# EAGLE board AFM_Power_board__ALL_SMD (EAGLE 9.6.2)
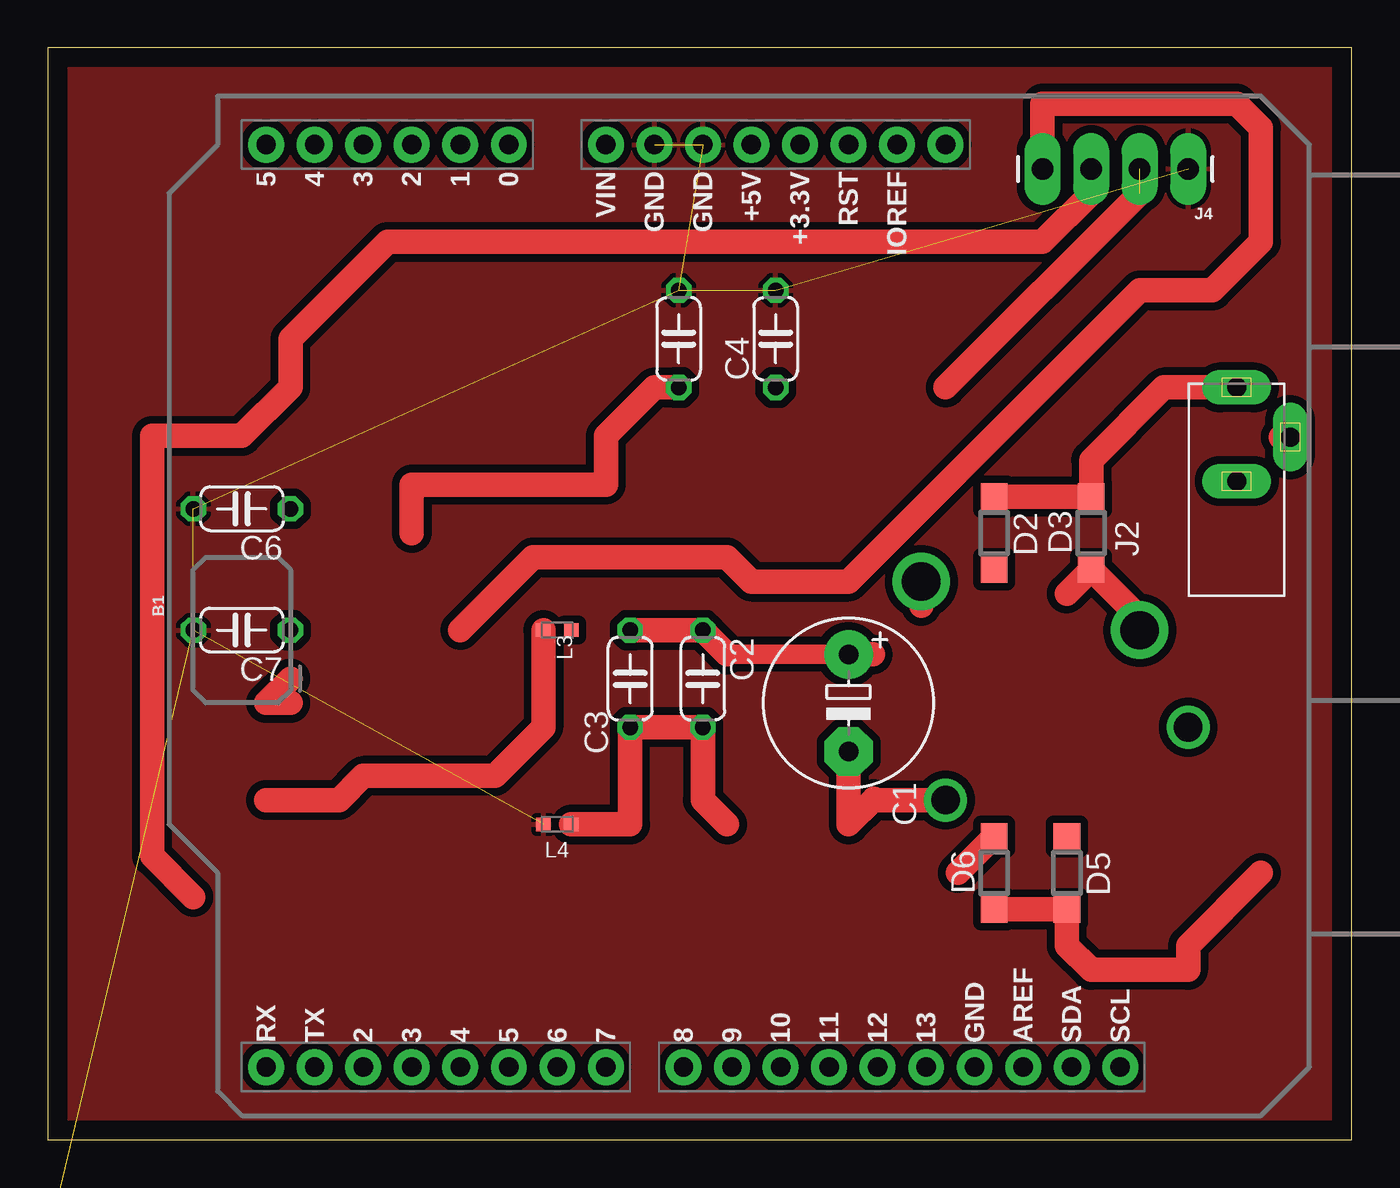
[diagram p0: board, top side]
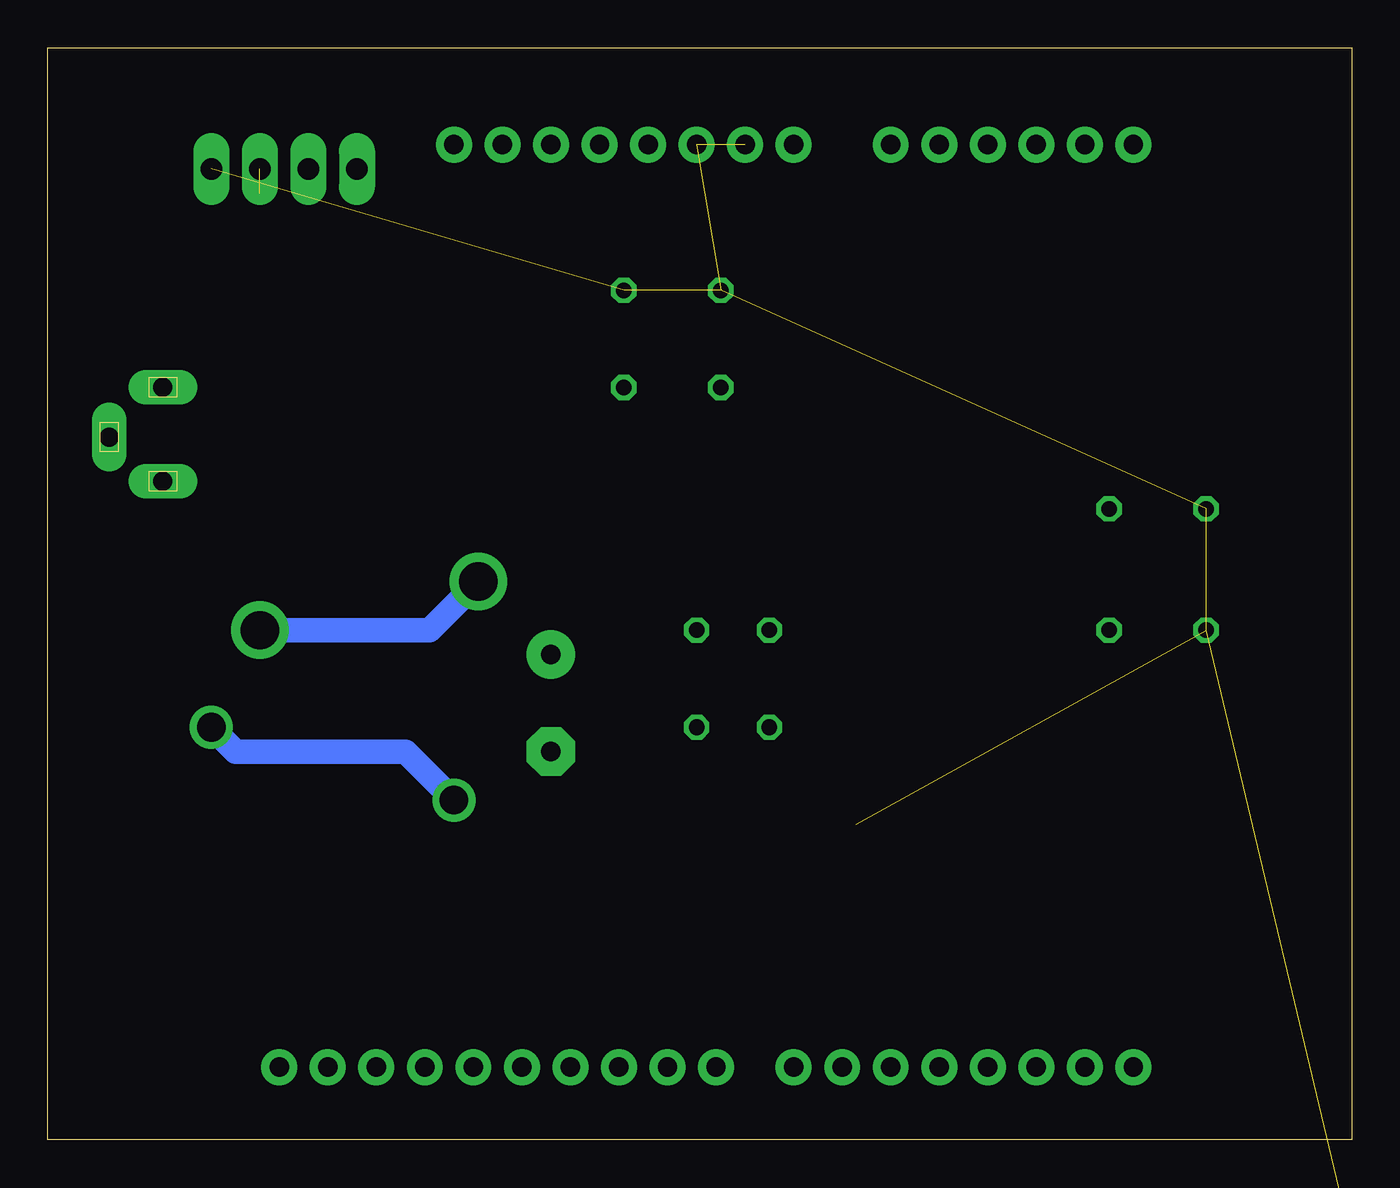
[diagram p1: board, bottom side, seen from below]

Size 68.25 x 57.14 mm. Coordinates in mm from the lower left corner, seen from the top.
Outline: 0,0 68.25,0 68.25,57.14 0,57.14 0,0
Copper layers (1*16): Top 0.035mm / dielectric 1.5mm / Bottom 0.035mm
Design rules "default": minimum track width 6mil, minimum drill 0.35mm, track to track 6mil, track to pad 6mil, pad to pad 6mil, via to via 6mil, smd to smd 6mil, copper to edge 40mil, drill to drill 6mil, minimum pad ring 10mil, minimum via ring 8mil, stop-mask expansion 4mil, vias tented up to drill 0mil, thermal gap 10mil

## Footprints (pad centres in the part's own frame; a part is rotated, then mirrored left to right if it is on the bottom)
UNO_R3_SHIELD = drill 1.016 pad 1.88: 3.3V 24.13,-2.54; 5V 24.13,0; A0 24.13,12.7; A1 24.13,15.24; A2 24.13,17.78; A3 24.13,20.32; A4 24.13,22.86; A5 24.13,25.4; AREF -24.13,-14.224; D2 -24.13,20.32; D3 -24.13,17.78; D4 -24.13,15.24; D5 -24.13,12.7; D6 -24.13,10.16; D7 -24.13,7.62; D8 -24.13,3.556; D9 -24.13,1.016; D10 -24.13,-1.524; D11 -24.13,-4.064; D12 -24.13,-6.604; D13 -24.13,-9.144; GND@0 24.13,2.54; GND@1 24.13,5.08; GND@2 -24.13,-11.684; IOREF 24.13,-7.62; NC 24.13,-10.16; RES 24.13,-5.08; RX -24.13,25.4; SCL -24.13,-19.304; SDA -24.13,-16.764; TX -24.13,22.86; VIN 24.13,7.62
E5-8,5 = drill 1.016 pad 2.54: + -2.54,0 | drill 1.016 pad 2.54 octagon: - 2.54,0
C050-024X044 = drill 0.813 octagon: 1 -2.54,0; 2 2.54,0
0805 = smd 0.8 x 1.2: 1 -0.9,0; 2 0.9,0
0603 = smd 1.1 x 1: 1 -0.85,0; 2 0.85,0
SOD123 = smd 1.4 x 1.4: A 1.9,0; C -1.9,0
694103303002 = drill 1 pad 1.8 long: 1 0,0; 2 -4.9,0; 3 -2.6,-2.8
1X04_LONGPADS = drill 1.118 pad 1.88 long: 1 0,0; 2 2.54,0; 3 5.08,0; 4 7.62,0
WE-CBF_0603_W2.2 = smd 0.75 x 0.7: 1 -0.725,0; 2 0.725,0
MSOP-16_MSE = smd 1.397 x 0.279: 1 -2.184,1.751; 2 -2.184,1.251; 3 -2.184,0.751; 4 -2.184,0.25; 5 -2.184,-0.25; 6 -2.184,-0.751; 7 -2.184,-1.251; 8 -2.184,-1.751; 9 2.184,-1.751; 10 2.184,-1.251; 11 2.184,-0.751; 12 2.184,-0.25; 13 2.184,0.25; 14 2.184,0.751; 15 2.184,1.251; 16 2.184,1.751 | smd 1.753 x 2.946: 17 0,0

## Placement (x,y rotation side)
B1  ARDUINO_UNO_R3_SHIELDBASIC  [UNO_R3_SHIELD]  36.83,27.94 90 top
C1  220uF  [E5-8,5]  41.91,22.86 270 top
C2  10uF  [C050-024X044]  34.29,24.13 270 top
C3  1uF  [C050-024X044]  30.48,24.13 270 top
C4  10uF  [C050-024X044]  38.1,41.91 90 top
C5  1uF  [C050-024X044]  33.02,41.91 90 top
C6  10uF  [C050-024X044]  10.16,33.02 180 top
C7  1uF  [C050-024X044]  10.16,26.67 180 top
C13  1.0uF  [0805]  6.35,-12.7 0 top  (outside the outline)
C14  10uF  [0805]  -5.08,-19.05 0 top  (outside the outline)
C15  10nF  [0603]  -5.08,-22.86 0 top  (outside the outline)
C16  10uF  [0805]  -1.27,-19.05 0 top  (outside the outline)
C17  10nF  [0603]  -1.27,-22.86 0 top  (outside the outline)
C18  10uF  [0805]  2.54,-19.05 0 top  (outside the outline)
C19  10uF  [0805]  6.35,-19.05 0 top  (outside the outline)
D2  1n4004  [SOD123]  49.53,31.75 270 top
D3  1n4004  [SOD123]  54.61,31.75 90 top
D5  1n4004  [SOD123]  53.34,13.97 270 top
D6  1n4004  [SOD123]  49.53,13.97 90 top
J2  694103303002  [694103303002]  62.23,39.37 90 top
J4  [1X04_LONGPADS]  59.69,50.8 180 top
L3  60Ohm@100 MHz  [WE-CBF_0603_W2.2]  26.67,26.67 180 top
L4  60Ohm@100 MHz  [WE-CBF_0603_W2.2]  26.67,16.51 180 top
R3  220  [0603]  2.54,-22.86 0 top  (outside the outline)
R4  100k  [0603]  6.35,-22.86 0 top  (outside the outline)
R5  100k  [0603]  -5.08,-26.67 0 top  (outside the outline)
R6  300k  [0603]  -1.27,-26.67 0 top  (outside the outline)
R7  300k  [0603]  2.54,-26.67 0 top  (outside the outline)
U2  LTC3260EMSE#PBF  [MSOP-16_MSE]  -2.54,-7.62 0 top  (outside the outline)

## Library data of the parts
B1 = SparkFun-Boards
C1 = BeagleBone_Blue_R3
C2-C7 = BeagleBone_Black_Wireless
C13 = SparkFun-Capacitors; PROD_ID: CAP-11625
C14 C16 C18 C19 = SparkFun-Capacitors; PROD_ID: CAP-14259
C15 C17 = SparkFun-Capacitors; PROD_ID: CAP-00867
D2 D3 D5 D6 = diode
J2 = DC Power Jacks; CREATED_BY: PCBLayout.com; DIGIKEY_PART_NUMBER: 732-5925-ND; MANUFACTURER: Wurth Electronics Inc.; MPN: 694103303002
J4 = SparkFun-Connectors; PROD_ID: CONN-09696
L3 L4 = Wurth_EMC Components_WE-CBF; DATASHEET-URL: https://www.we-online.com/redexpert/spec/74279267?ae; IR2: 2000mA; MOUNT: SMT; PART-NUMBER: 74279267; RDC-MAX: 0.3Ohm; TYPE: High Speed; Z-MAX: 110Ohm@650 MHz
R3 = SparkFun-Resistors; PROD_ID: RES-07861
R4 R5 = SparkFun-Resistors; PROD_ID: RES-07828
R6 R7 = SparkFun-Resistors; PROD_ID: RES-10809
U2 = LTC3260EMSE_PBF (1); AVAILABILITY: In Stock; CHECK_PRICES: https://www.snapeda.com/parts/LTC3260EMSE%23PBF/Analog+Devices/view-part/?ref=eda; DESCRIPTION: Low Noise Dual Supply Inverting Charge Pump; MF: Analog Devices; MP: LTC3260EMSE#PBF; PACKAGE: MSOP -16 Analog Devices; PRICE: None; PURCHASE-URL: https://www.snapeda.com/api/url_track_click_mouser/?unipart_id=4339513&manufacturer=Analog Devices&part_name=LTC3260EMSE#PBF&search_term=None; SNAPEDA_LINK: https://www.snapeda.com/parts/LTC3260EMSE%23PBF/Analog+Devices/view-part/?ref=snap

## Nets
AGND: B1.GND@0 B1.GND@1 C4.2 C5.2 C6.2 C7.2 C14.1 C15.2 C16.2 C17.2 C18.2 C19.2 J4.1 L4.2 R3.1 R6.1 R7.1 U2.14 U2.17
GROUND: C1.-
LDO+: C19.1 R4.2 U2.12
LDO-: C18.1 R5.2 U2.5
N$1: J4.4
N$5: L3.2
N$6: C13.1 U2.7 U2.8
N$7: C13.2 U2.9 U2.10
N$9: D5.A D6.C
N$10: D6.A
N$11: D3.C
N$12: C17.1 U2.3
N$13: C15.1 U2.16
N$14: C16.1 U2.6
N$15: R3.2 U2.2
N$16: R5.1 R7.2 U2.4
N$17: R4.1 R6.2 U2.15
POWERP: D2.C D3.A J2.1
S$1: J2.3
S$3: C1.+ C2.1 C3.1
S$4: C2.2 C3.2 L4.1
S$6: J4.2
V5_OUT: C5.1
V15+: U2.1 U2.11 U2.13
VMINUS5_OUT: J4.3

## Tracks (layer width: path | path; a pad name or v marks a point on that pad's centre or on a via)
AGND  (18 unrouted)
  pour Top (isolate 0.406, rank 6): 0,57.15 68.58,57.15 68.58,0 0,0
GROUND  (via drill 1.5)
  Top 1.27: C1.- 41.91,16.51 43.18,17.78 | 43.18,17.78 43.24,17.84 | 43.18,17.78 v46.99,17.78
  Bottom 1.27: v59.69,21.59 58.42,20.32 49.53,20.32 v46.99,17.78
LDO+  (2 unrouted)
LDO-  (2 unrouted)
N$1
  Top 1.27: J4.4 52.07,54.22 62.23,54.22 63.5,52.95 63.5,46.99 60.96,44.45 57.15,44.45 41.91,29.21 36.83,29.21 35.56,30.48 25.4,30.48 21.59,26.67
N$5
  Top 1.27: L3.2 25.95,21.59 23.41,19.05 16.51,19.05 15.24,17.78 11.43,17.78
N$6  (2 unrouted)
N$7  (2 unrouted)
N$9
  Top 1.27: 63.5,13.97 59.69,10.16 59.69,8.89 54.61,8.89 53.34,10.16 D5.A D6.C
N$10
  Top 1.27: D6.A 47.63,13.97
N$11  (via drill 2)
  Top 1.27: 53.34,28.58 D3.C 57.15,27.31 v57.15,26.67 | v45.72,29.21 45.72,27.94
  Bottom 1.27: v57.15,26.67 48.26,26.67 v45.72,29.21
N$12  (1 unrouted)
N$13  (1 unrouted)
N$14  (1 unrouted)
N$15  (1 unrouted)
N$16  (2 unrouted)
N$17  (2 unrouted)
POWERP
  Top 1.27: J2.1 58.42,39.37 54.61,35.56 D3.A D2.C
S$1
  Top 1.27: J2.3 64.53,36.77
S$3
  Top 1.016: C1.+ 35.56,25.4
  Top 1.27: C1.+ 43.18,25.4 | 35.56,25.4 C2.1 C3.1
S$4
  Top 1.27: 35.56,16.51 34.29,17.78 C2.2 C3.2 30.48,16.51 L4.1
S$5
  Top 1.27: 12.7,22.86 11.43,22.86 12.7,24.13
S$6  (1 unrouted)
  Top 1.27: 57.15,49.53 46.99,39.37
V5_OUT
  Top 1.27: C5.1 31.75,39.37 29.21,36.83 29.21,34.29 19.05,34.29 19.05,31.75
V15+  (2 unrouted)
VMINUS5_OUT
  Top 1.27: 7.62,12.7 5.46,14.86 5.46,36.83 10.16,36.83 12.7,39.37 12.7,41.91 17.78,46.99 52.07,46.99 54.61,49.53 J4.3